# Altium PCB ART_CARD Rev 5.PcbDoc (part 3 of 13)
Units mil, origin at the board's own origin, x right, y up, seen from the top; angles counter-clockwise.
Board outline 6600.39 x 3903.54 mil, 8 copper layers (Top, Inner Layer 2, Inner Layer 3, Inner Layer 4, Inner Layer 5, Inner Layer 6, Inner Layer 7, Bottom), stack 63.111 mil thick; 542 components, 382 nets, 2410 pads, 1433 vias.
Unrouted connection lines stored in the file: 1247.
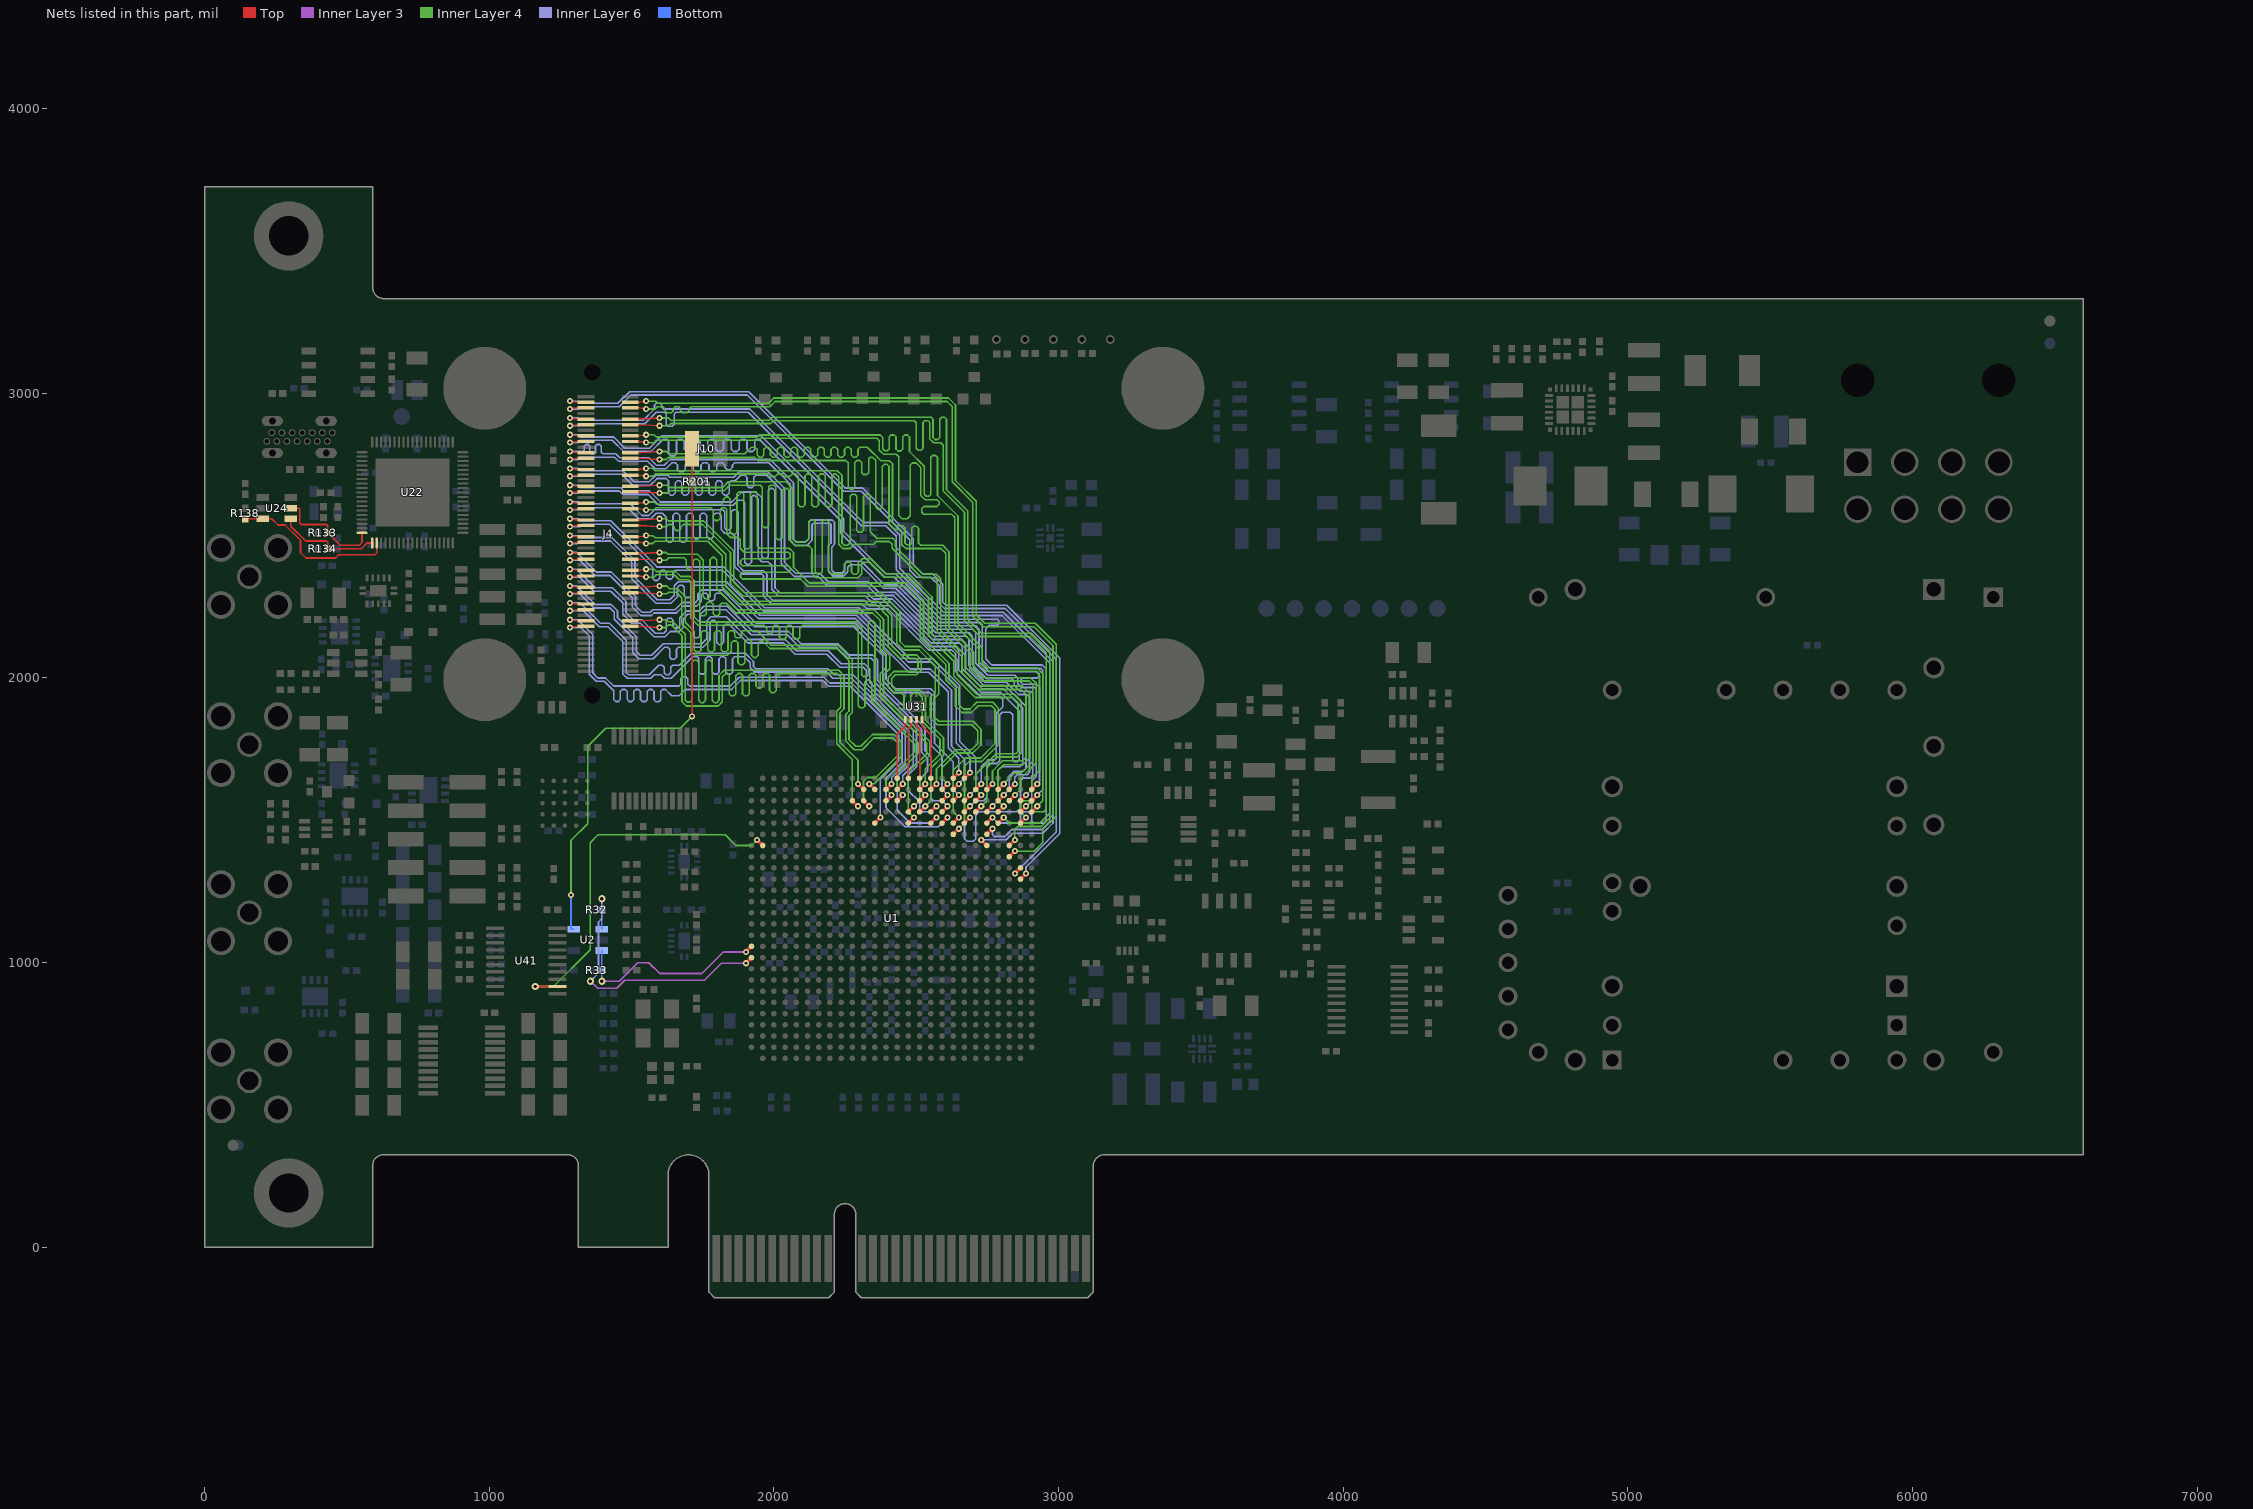
[diagram p9: the nets of this part, all layers, seen from the top]

## Via types
v1: diameter 25.59, hole 11.81, Top to Bottom, 915 vias
v2: diameter 21.65, hole 9.84, Top to Bottom, 518 vias

## Nets (pads, with @x,y where several pads share a name; then routed paths per layer and width w, separated by ;. In a path a pad name is that pad's centre, name@x,y a point inside that pad or via, vN(x,y) a via of type N, cw(c..) or ccw(c..) an arc to the next point about the centre after c; other vN are vias at no path point) (continued)
DCLS_IN3: U1.AE7 U41.12 | length 1350.6
  Top w5.91: v1(1161.42,916.34) U41.12@1240.16,916.34
  Top w11.81: v2(1940.94,1431.1) U1.AE7@1960.63,1411.42
  Inner Layer 4 w5.91: v1(1161.42,916.34) 1225.39,916.34 1354.33,1045.28 1354.33,1421.26 1381.89,1448.82 1828.74,1448.82 1866.14,1411.42 1921.26,1411.42 v2(1940.94,1431.1)
DCLS_OUT0: U1.N1 U31.2 | length 218.5
  Top w5.91: U1.N1@2433.07,1647.64 2433.07,1802.17 2461.61,1830.71 U31.2@2461.61,1854.33
DCLS_OUT1: U1.M1 U31.3 | length 210.4
  Top w5.91: U1.M1@2472.44,1647.64 2472.44,1821.85 2481.3,1830.71 U31.3@2481.3,1854.33
DCLS_OUT2: U1.L1 U31.4 | length 211.2
  Top w5.91: U31.4@2500.98,1854.33 2500.98,1830.71 2511.81,1819.88 U1.L1@2511.81,1647.64
DCLS_OUT3: U1.K1 U31.5 | length 219.3
  Top w5.91: U31.5@2520.67,1854.33 2520.67,1830.71 2551.18,1800.2 U1.K1@2551.18,1647.64
EECLK: R134.1 U22.1 U24.4 | length 365.9
  Top w5.91: U24.4@303.15,2559.06 303.15,2533.46 355.31,2481.3 428.15,2481.3 433.07,2476.38 R134.1@433.07,2453.74 551.18,2453.74 571.85,2474.41 U22.1@588.58,2474.41
EECS: R133.1 U22.76 U24.5 | length 384
  Top w5.91: U24.5@303.15,2596.46 330.71,2596.46 334.65,2592.52 334.65,2544.29 340.06,2538.88 428.64,2538.88 433.07,2534.45 R133.1@433.07,2509.84 476.38,2466.54 543.31,2466.54 553.15,2476.38 U22.76@553.15,2509.84
EEDATA: R138.2 U22.2 U24.3 | length 586.3
  Top w5.91: R138.2@142.72,2559.06 U24.3@204.72,2559.06 236.22,2559.06 257.87,2537.4 282.48,2537.4 336.61,2483.27 336.61,2440.94 356.3,2421.26 459.65,2421.26 471.46,2433.07 598.43,2433.07 604.33,2438.98 U22.2@604.33,2474.41
EEPROM_SCL: R32.2 U1.AF17 U2.1 | length 1034.9
  Top w11.81: v2(1901.57,998.03) U1.AF17@1921.26,1017.72
  Inner Layer 3 w5.91: v1(1355.32,935.04) 1380.59,909.77 1380.59,909.45 1447.83,909.45 1476.38,937.99 1755.91,937.99 1815.94,998.03 v2(1901.57,998.03)
  Inner Layer 6 w5.91: v1(1355.32,935.04) 1383.86,963.58 1383.86,1142.72 1395.67,1154.53 v1(1395.67,1224.41)
  Bottom w5.91: U2.1@1395.67,1117.13 R32.2@1395.67,1186.02 v1(1395.67,1224.41)
EEPROM_SDA: R33.2 U1.AF16 U2.3 | length 715.2
  Top w11.81: v2(1901.57,1037.4) U1.AF16@1921.26,1057.09
  Inner Layer 3 w5.91: v1(1395.67,935.04) 1456.69,935.04 1521.65,1000 1560.04,1000 1598.43,961.61 1746.06,961.61 1821.85,1037.4 v2(1901.57,1037.4)
  Bottom w5.91: v1(1395.67,935.04) R33.2@1395.67,973.43 U2.3@1395.67,1042.32
EEPROM_WP: J10.1 R201.2 U2.5 | length 2027.6
  Top w5.91: J10.1@1711.81,2805.12 1711.81,2724.21 1712.6,2723.43 R201.2@1712.6,2688.98 v2(1712.6,1865.16)
  Inner Layer 4 w5.91: v2(1287.4,1237.2) 1287.4,1430.12 1345.47,1488.19 1345.47,1759.84 1409.45,1823.82 1671.26,1823.82 v2(1712.6,1865.16)
  Bottom w5.91: v2(1287.4,1237.2) 1287.4,1117.13 U2.5@1297.24,1117.13
EXT_CI0: J4.65 U1.L3 | length 2112
  Top w5.91: v2(1283.46,2354.33) 1307.09,2358.27 J4.65@1339.57,2358.27
  Top w11.81: U1.L3@2511.81,1568.9 v2(2531.5,1588.58)
  Inner Layer 6 w5.91: v2(1283.46,2354.33) 1317.91,2354.33 1367.13,2305.12 1427.17,2305.12 1468.5,2263.78 1468.5,2224.41 1500.98,2191.93 1531.5,2191.93 1578.74,2144.69 1617.1,2144.69 1635.8,2163.39 1667.29,2163.39 1681.1,2177.19 1681.1,2206.72 1697.81,2223.43 1709.65,2223.43 1716.54,2216.54 1716.54,2148.62 1723.43,2141.73 1733.27,2141.73 1740.16,2148.62 1740.16,2221.49 1758.83,2240.16 1831.72,2240.16 1920.3,2151.57 2046.29,2151.57 2090.58,2107.28 2221.49,2107.28 2259.87,2068.9 2341.56,2068.9 2352.36,2058.1 2352.36,1986.22 2518.7,1819.88 2518.7,1739.17 2539.37,1718.5 2539.37,1672.24 2511.81,1644.69 2511.81,1608.27 v2(2531.5,1588.58)
EXT_CI1: J4.83 U1.R5 | length 2112
  Top w5.91: v2(1283.46,2177.17) 1307.09,2181.1 J4.83@1339.57,2181.1
  Top w11.81: U1.R5@2354.33,1490.16 v2(2374.02,1509.84)
  Inner Layer 6 w5.91: v2(1283.46,2177.17) 1321.85,2177.17 1351.38,2147.64 1351.38,2012.82 1376.01,1988.19 1403.54,1988.19 1437.01,1954.72 1437.01,1924.21 1443.9,1917.32 1453.74,1917.32 1460.63,1924.21 1460.63,1952.76 1467.15,1959.28 1477.36,1959.28 1484.25,1952.39 1484.25,1924.21 1491.14,1917.32 1500.98,1917.32 1507.87,1924.21 1507.87,1952.76 1514.4,1959.28 1524.61,1959.28 1531.5,1952.39 1531.5,1923.23 1537.4,1917.32 1549.21,1917.32 1555.12,1923.23 1555.12,1952.76 1561.64,1959.28 1571.85,1959.28 1578.74,1952.39 1578.74,1923.23 1585.63,1916.34 1595.47,1916.34 1602.36,1923.23 1602.36,1952.76 1608.88,1959.28 1619.09,1959.28 1641.36,1937.01 1666.34,1937.01 1688.61,1959.28 1850.98,1959.28 1882.85,1991.14 2171.29,1991.14 2191.96,1970.47 2267.72,1970.47 2437.99,1800.2 2437.99,1708.66 2374.02,1644.69 v2(2374.02,1509.84)
EXT_CO0: J4.54 U1.L2 | length 2111.7
  Top w5.91: J4.54@1495.08,2476.38 1527.56,2476.38 v2(1551.18,2472.44)
  Top w11.81: U1.L2@2511.81,1608.27 v2(2531.5,1627.95)
  Inner Layer 4 w5.91: v2(1551.18,2472.44) 1574.8,2472.44 1582.68,2480.31 1767.75,2480.31 1818.9,2429.16 1818.9,2318.93 1879.95,2257.87 2359.25,2257.87 2401.57,2215.55 2401.57,2109.28 2441.96,2068.9 2497.08,2068.9 2505.91,2060.07 2505.91,2032.45 2496.17,2022.72 2421.37,2022.72 2401.57,2002.92 2401.57,1966.56 2422.27,1945.87 2448.82,1945.87 2456.69,1937.99 2456.69,1892.72 2463.58,1885.83 2473.43,1885.83 2480.32,1892.72 2480.32,1937.99 2488.19,1945.87 2506.92,1945.87 2520.67,1932.12 2520.67,1847.47 2583.66,1784.48 2583.66,1732.25 2531.5,1680.09 v2(2531.5,1627.95)
EXT_CO1: J4.66 U1.P3 | length 2112
  Top w5.91: J4.66@1495.08,2358.27 1527.56,2358.27 v2(1551.18,2354.33)
  Top w11.81: U1.P3@2393.7,1568.9 v2(2413.39,1588.58)
  Inner Layer 4 w5.91: v2(1551.18,2354.33) 1578.74,2354.33 1586.61,2362.2 1649.61,2362.2 1667.36,2344.45 1700.86,2344.45 1707.68,2337.63 1707.68,2210.66 1733.3,2185.04 1964.57,2185.04 1974.41,2175.2 1974.41,2161.42 1980.32,2155.51 1990.16,2155.51 1996.06,2161.42 1996.06,2178.15 2002.95,2185.04 2012.8,2185.04 2019.69,2178.15 2019.69,2142.72 2026.57,2135.83 2036.42,2135.83 2043.31,2142.72 2043.31,2178.15 2050.2,2185.04 2060.04,2185.04 2066.93,2178.15 2066.93,2142.72 2073.82,2135.83 2083.66,2135.83 2090.55,2142.72 2090.55,2175.2 2100.39,2185.04 2282.48,2185.04 2296.26,2171.26 2296.26,1902.56 2303.15,1895.67 2313.98,1895.67 2319.88,1901.57 2319.88,1986.22 2326.73,1993.07 2335.63,1993.07 2343.5,1985.2 2343.5,1917.35 2494.09,1766.76 2494.09,1740.13 2393.7,1639.73 2393.7,1608.27 v2(2413.39,1588.58)
EXT_IO0: J4.69 U1.K4 | length 2112.1
  Top w5.91: v2(1283.46,2322.83) 1307.09,2318.9 J4.69@1339.57,2318.9
  Top w11.81: U1.K4@2551.18,1529.53 v2(2570.87,1549.21)
  Inner Layer 6 w5.91: v2(1283.46,2322.83) 1307.09,2322.83 1312.99,2316.93 1372.05,2257.87 1428.12,2257.87 1450.79,2235.21 1450.79,2211.61 1516.73,2145.67 1516.73,2093.5 1530.51,2079.72 1570.87,2079.72 1610.87,2119.73 1746.06,2119.73 1763.78,2137.45 1763.78,2199.8 1778.54,2214.57 1832.68,2214.57 1912.4,2134.84 2039.37,2134.84 2078.74,2095.47 2190.94,2095.47 2226.38,2060.04 2236.22,2050.2 2317.91,2050.2 2336.61,2031.5 2336.61,1985.24 2500.98,1820.87 2500.98,1687.99 2472.44,1659.45 2472.44,1604.33 2511.81,1564.96 2511.81,1536.42 2518.7,1529.53 2551.18,1529.53 v2(2570.87,1549.21)
EXT_IO1: J4.63 U1.J4 | length 2111.8
  Top w5.91: v2(1283.46,2381.89) 1307.09,2377.95 J4.63@1339.57,2377.95
  Top w11.81: U1.J4@2590.55,1529.53 v2(2610.24,1549.21)
  Inner Layer 6 w5.91: v2(1283.46,2381.89) 1307.09,2381.89 1372.05,2316.93 1433.07,2316.93 1480.32,2269.69 1480.32,2229.33 1505.91,2203.74 1536.42,2203.74 1582.68,2157.48 1613.19,2157.48 1622.05,2166.34 1622.05,2202.76 1628.94,2209.65 1638.78,2209.65 1645.67,2202.76 1645.67,2182.09 1652.56,2175.2 1662.4,2175.2 1669.29,2182.09 1669.29,2211.61 1692.91,2235.24 1737.2,2235.24 1753.94,2251.97 1836.61,2251.97 1925.2,2163.39 2051.18,2163.39 2095.47,2119.09 2226.38,2119.09 2264.76,2080.71 2346.46,2080.71 2364.17,2062.99 2364.17,1991.14 2530.51,1824.8 2530.51,1744.09 2551.18,1723.43 2551.18,1577.76 2560.04,1568.9 2590.55,1568.9 v2(2610.24,1549.21)
EXT_IO2: J4.40 U1.H6 | length 3109.2
  Top w5.91: J4.40@1495.08,2614.17 1527.56,2614.17 v2(1551.18,2618.11)
  Top w11.81: U1.H6@2629.92,1450.79 v2(2649.61,1470.47)
  Inner Layer 4 w5.91: v2(1551.18,2618.11) 1579.72,2618.11 1587.6,2610.24 1815.94,2610.24 1822.83,2617.13 1822.83,2627.95 1830.71,2635.83 1838.58,2635.83 1846.46,2627.95 1846.46,2511.81 1853.35,2504.92 1863.19,2504.92 1870.08,2511.81 1870.08,2646.65 1876.97,2653.54 1886.81,2653.54 1893.7,2646.65 1893.7,2460.63 1900.59,2453.74 1910.43,2453.74 1917.32,2460.63 1917.32,2646.65 1924.21,2653.54 1934.06,2653.54 1940.94,2646.65 1940.94,2464.57 1949.8,2455.71 2054.13,2455.71 2068.9,2440.94 2068.9,2388.67 2123.9,2333.66 2465.55,2333.66 2525.59,2273.62 2525.59,2141.73 2615.16,2052.17 2615.16,1999.02 2649.61,1964.57 2649.61,1906.5 2665.35,1890.75 2688.98,1890.75 2712.6,1914.37 2768.7,1914.37 2788.39,1894.69 2788.39,1764.76 2730.32,1706.69 2686.02,1706.69 2669.29,1689.96 2669.29,1490.16 v2(2649.61,1470.47)
EXT_IO3: J4.42 U1.H5 | length 3109.2
  Top w5.91: J4.42@1495.08,2594.49 1527.56,2594.49 v2(1551.18,2590.55)
  Top w11.81: U1.H5@2629.92,1490.16 v2(2649.61,1509.84)
  Inner Layer 4 w5.91: v2(1551.18,2590.55) 1578.74,2590.55 1586.61,2598.43 1777.56,2598.43 1787.4,2588.58 1787.4,2560.04 1794.29,2553.15 1804.13,2553.15 1811.02,2560.04 1811.02,2591.54 1817.91,2598.43 1827.76,2598.43 1834.65,2591.54 1834.65,2506.92 1848.45,2493.11 1875,2493.11 1881.89,2486.22 1881.89,2455.74 1895.74,2441.89 2051.25,2441.89 2057.09,2436.05 2057.09,2424.21 2051.18,2418.31 1889.76,2418.31 1882.87,2411.42 1882.87,2401.57 1889.76,2394.69 2050.2,2394.69 2057.09,2387.8 2057.09,2377.95 2050.2,2371.06 1889.76,2371.06 1882.87,2364.17 1882.87,2354.33 1889.76,2347.44 2093.42,2347.44 2119.01,2321.85 2460.66,2321.85 2513.78,2268.73 2513.78,2136.84 2603.35,2047.27 2603.35,1994.12 2637.8,1959.67 2637.8,1901.6 2660.46,1878.94 2693.87,1878.94 2717.49,1902.56 2763.81,1902.56 2776.57,1889.79 2776.57,1769.66 2725.42,1718.5 2672.95,1718.5 2629.92,1675.48 2629.92,1529.53 v2(2649.61,1509.84)
EXT_IO4: J4.75 U1.K5 | length 2111.9
  Top w5.91: v2(1283.46,2263.78) 1307.09,2259.84 J4.75@1339.57,2259.84
  Top w11.81: U1.K5@2551.18,1490.16 v2(2570.87,1509.84)
  Inner Layer 6 w5.91: v2(1283.46,2263.78) 1298.23,2263.78 1318.9,2263.78 1390.75,2191.93 1422.24,2191.93 1481.3,2132.87 1481.3,2018.7 1489.17,2010.83 1562.01,2010.83 1595.47,2044.29 1607.28,2044.29 1614.17,2037.4 1614.17,2017.72 1621.06,2010.83 1630.91,2010.83 1637.8,2017.72 1637.8,2037.4 1644.69,2044.29 1667.32,2044.29 1709.65,2086.61 1899.61,2086.61 1928.15,2058.07 1928.15,2040.35 1936.02,2032.48 2189.96,2032.48 2211.61,2010.83 2277.56,2010.83 2473.43,1814.96 2473.43,1693.9 2433.07,1653.54 2433.07,1535.43 2478.35,1490.16 2551.18,1490.16 v2(2570.87,1509.84)
EXT_IO5: J4.81 U1.J5 | length 2111.8
  Top w5.91: v2(1283.46,2204.72) 1307.09,2200.79 J4.81@1339.57,2200.79
  Top w11.81: U1.J5@2590.55,1490.16 v2(2610.24,1509.84)
  Inner Layer 6 w5.91: v2(1283.46,2204.72) 1311.02,2204.72 1363.19,2152.56 1363.19,2017.72 1380.91,2000 1408.46,2000 1437.01,1971.46 1666.34,1971.46 1673.23,1978.35 1673.23,1997.05 1680.12,2003.94 1689.96,2003.94 1696.85,1997.05 1696.85,1978.35 1703.74,1971.46 1846.46,1971.46 1877.95,2002.95 2176.18,2002.95 2196.85,1982.28 2272.64,1982.28 2359.25,1895.67 2359.31,1895.67 2449.8,1805.18 2449.8,1703.74 2393.7,1647.64 2393.7,1544.29 2460.63,1477.36 2577.76,1477.36 v2(2610.24,1509.84)
EXT_IO6: J4.58 U1.M4 | length 2112
  Top w5.91: J4.58@1495.08,2437.01 1532.48,2437.01 v2(1598.43,2440.94)
  Top w11.81: U1.M4@2472.44,1529.53 v2(2492.13,1549.21)
  Inner Layer 4 w5.91: v2(1598.43,2440.94) 1622.05,2440.94 1628.94,2434.06 1731.3,2434.06 1751.97,2413.39 1751.97,2285.43 1758.86,2278.54 1768.7,2278.54 1775.59,2285.43 1775.59,2415.35 1783.46,2423.23 1791.34,2423.23 1799.21,2415.35 1799.21,2312.99 1872.05,2240.16 2351.38,2240.16 2384.84,2206.69 2384.84,2100.39 2406.5,2078.74 2406.5,2032.48 2384.84,2010.83 2384.84,1938.98 2548.23,1775.59 2548.23,1729.33 2511.81,1692.91 2511.81,1568.9 v2(2492.13,1549.21)
EXT_IO7: J4.52 U1.L4 | length 2112.1
  Top w5.91: J4.52@1495.08,2496.06 1527.56,2496.06 v2(1551.18,2500)
  Top w11.81: U1.L4@2511.81,1529.53 v2(2531.5,1549.21)
  Inner Layer 4 w5.91: v2(1551.18,2500) 1574.8,2500 1582.68,2492.13 1772.64,2492.13 1830.71,2434.06 1830.71,2323.82 1884.84,2269.69 2364.17,2269.69 2413.39,2220.47 2413.39,2114.17 2446.85,2080.71 2501.97,2080.71 2517.72,2064.96 2517.72,2027.56 2500.98,2010.83 2426.18,2010.83 2413.39,1998.03 2413.39,1971.46 2427.17,1957.68 2511.81,1957.68 2532.48,1937.01 2532.48,1852.36 2595.47,1789.37 2595.47,1727.36 2551.18,1683.07 2551.18,1568.9 v2(2531.5,1549.21)
EXT_IO8: J4.57 U1.H3 | length 2112.2
  Top w5.91: v2(1283.46,2440.94) 1307.09,2437.01 J4.57@1339.57,2437.01
  Top w11.81: U1.H3@2629.92,1568.9 v2(2649.61,1588.58)
  Inner Layer 6 w5.91: v2(1283.46,2440.94) 1307.09,2440.94 1375.98,2372.05 1428.15,2372.05 1513.78,2286.42 1513.78,2254.13 1536.61,2231.3 1564.96,2231.3 1573.82,2240.16 1652.56,2240.16 1677.17,2264.76 1723.43,2264.76 1733.27,2274.61 1733.27,2296.26 1746.06,2309.06 1819.88,2309.06 1937.01,2191.93 2285.43,2191.93 2393.7,2083.66 2393.7,1995.05 2427.17,1961.59 2551.21,1961.59 2563.98,1948.82 2563.98,1770.67 2629.92,1704.72 2629.92,1608.27 v2(2649.61,1588.58)
EXT_IO9: J4.45 U1.G3 | length 2112.2
  Top w5.91: v2(1283.46,2559.06) 1307.09,2555.12 J4.45@1339.57,2555.12
  Top w11.81: U1.G3@2669.29,1568.9 v2(2688.98,1588.58)
  Inner Layer 6 w5.91: v2(1283.46,2559.06) 1311.02,2559.06 1317.91,2552.17 1427.17,2552.17 1589.57,2389.76 1824.3,2389.76 1967.01,2247.05 2298.23,2247.05 2477.36,2067.91 2558.07,2067.91 2652.56,1973.43 2652.56,1776.55 2708.66,1720.44 2708.66,1608.27 v2(2688.98,1588.58)
EXT_IO10: J4.64 U1.N3 | length 2112.2
  Top w5.91: J4.64@1495.08,2377.95 1527.56,2377.95 v2(1551.18,2381.89)
  Top w11.81: U1.N3@2433.07,1568.9 v2(2452.76,1588.58)
  Inner Layer 4 w5.91: v2(1551.18,2381.89) 1578.74,2381.89 1586.61,2374.02 1654.53,2374.02 1672.24,2356.3 1705.71,2356.3 1719.49,2342.52 1719.49,2215.55 1738.19,2196.85 2290.35,2196.85 2308.07,2179.13 2308.07,2011.81 2314.96,2004.92 2325.79,2004.92 2331.69,2010.83 2331.69,2192.91 2338.58,2199.8 2348.43,2199.8 2355.32,2192.91 2355.32,1922.24 2505.91,1771.65 2505.91,1735.24 2433.07,1662.4 2433.07,1608.27 v2(2452.76,1588.58)
EXT_IO11: J4.60 U1.M5 | length 2112.3
  Top w5.91: J4.60@1495.08,2417.32 1532.48,2417.32 v2(1598.43,2413.39)
  Top w11.81: U1.M5@2472.44,1490.16 v2(2492.13,1509.84)
  Inner Layer 4 w5.91: v2(1598.43,2413.39) 1622.05,2413.39 1630.91,2422.24 1684.06,2422.24 1691.93,2414.37 1691.93,2388.78 1698.82,2381.89 1708.66,2381.89 1715.55,2388.78 1715.55,2410.43 1722.44,2417.32 1731.3,2417.32 1739.17,2409.45 1739.17,2225.39 1746.06,2218.5 1755.91,2218.5 1762.8,2225.39 1762.8,2259.84 1769.69,2266.73 1778.54,2266.73 1786.42,2258.86 1786.42,2225.39 1793.31,2218.5 1803.15,2218.5 1810.04,2225.39 1810.04,2255.91 1816.93,2262.8 1832.68,2262.8 1867.13,2228.35 2346.49,2228.35 2373.03,2201.8 2373.03,2095.5 2394.69,2073.85 2394.69,2037.37 2373.03,2015.72 2373.03,1934.06 2536.42,1770.67 2536.42,1734.22 2472.44,1670.25 2472.44,1529.53 v2(2492.13,1509.84)
EXT_IO12: J4.59 U1.J3 | length 2112.3
  Top w5.91: v2(1283.46,2413.39) 1307.09,2417.32 J4.59@1339.57,2417.32
  Top w11.81: U1.J3@2590.55,1568.9 v2(2610.24,1588.58)
  Inner Layer 6 w5.91: v2(1283.46,2413.39) 1317.91,2413.39 1371.06,2360.24 1423.26,2360.24 1501.97,2281.53 1501.97,2249.24 1531.72,2219.49 1569.88,2219.49 1578.74,2228.35 1657.45,2228.35 1682.06,2252.95 1728.32,2252.95 1745.08,2269.71 1745.08,2291.34 1750.98,2297.24 1762.8,2297.24 1768.7,2291.34 1768.7,2277.56 1775.59,2270.67 1785.43,2270.67 1792.32,2277.56 1792.32,2291.34 1798.23,2297.24 1814.99,2297.24 1932.2,2180.04 2280.59,2180.04 2381.89,2078.74 2381.89,1990.16 2423.23,1948.82 2546.26,1948.82 2552.17,1942.91 2552.17,1762.8 2590.55,1724.41 2590.55,1608.27 v2(2610.24,1588.58)
EXT_IO13: J4.51 U1.H2 | length 2111.9
  Top w5.91: v2(1283.46,2500) 1307.09,2496.06 J4.51@1339.57,2496.06
  Top w11.81: U1.H2@2629.92,1608.27 v2(2649.61,1627.95)
  Inner Layer 6 w5.91: v2(1283.46,2500) 1309.06,2500 1315.94,2493.11 1431.1,2493.11 1511.81,2412.4 1511.81,2353.35 1590.55,2274.61 1633.86,2274.61 1649.61,2290.35 1649.61,2323.82 1663.39,2337.6 1832.68,2337.6 1949.8,2220.47 2290.35,2220.47 2479.33,2031.5 2549.21,2031.5 2624.02,1956.69 2624.02,1759.84 2669.29,1714.57 2669.29,1647.64 v2(2649.61,1627.95)
EXT_IO14: J4.48 U1.K2 | length 2112.4
  Top w5.91: J4.48@1495.08,2535.43 1532.48,2535.43 v2(1598.43,2531.5)
  Top w11.81: U1.K2@2551.18,1608.27 v2(2570.87,1627.95)
  Inner Layer 4 w5.91: v2(1598.43,2531.5) 1622.05,2531.5 1629.92,2539.37 1640.75,2539.37 1649.61,2530.51 1649.61,2524.61 1656.5,2517.72 1666.34,2517.72 1673.23,2524.61 1673.23,2530.51 1682.09,2539.37 1749.04,2539.37 1847.44,2440.97 1847.44,2331.72 1891.8,2287.36 2372.12,2287.36 2431.1,2228.38 2431.1,2123.06 2455.78,2098.39 2509.91,2098.39 2566.93,2041.37 2566.93,1948.79 2550.2,1932.06 2550.2,1859.28 2573.89,1835.59 2694.95,1835.59 2715.55,1814.99 2715.55,1769.66 2693.93,1748.03 2637.82,1748.03 2570.87,1681.07 v2(2570.87,1627.95)
EXT_IO15: J4.46 U1.J2 | length 2112
  Top w5.91: J4.46@1495.08,2555.12 1532.48,2555.12 v2(1598.43,2559.06)
  Top w11.81: U1.J2@2590.55,1608.27 v2(2610.24,1627.95)
  Inner Layer 4 w5.91: v2(1598.43,2559.06) 1622.05,2559.06 1629.92,2551.18 1753.94,2551.18 1859.25,2445.87 1859.25,2336.61 1896.65,2299.21 2376.97,2299.21 2442.91,2233.27 2442.91,2127.95 2460.63,2110.24 2514.76,2110.24 2578.74,2046.26 2578.74,1943.9 2562.01,1927.17 2562.01,1864.17 2578.74,1847.44 2699.8,1847.44 2727.36,1819.88 2727.36,1764.76 2698.82,1736.22 2642.72,1736.22 2590.55,1684.06 2590.55,1647.64 v2(2610.24,1627.95)
EXT_IO16: J4.53 U1.H1 | length 2112.3
  Top w5.91: v2(1283.46,2472.44) 1307.09,2476.38 J4.53@1339.57,2476.38
  Top w11.81: U1.H1@2629.92,1647.64 v2(2649.61,1667.32)
  Inner Layer 6 w5.91: v2(1283.46,2472.44) 1311.02,2472.44 1319.88,2481.3 1426.18,2481.3 1500,2407.48 1500,2348.43 1585.66,2262.77 1638.72,2262.77 1661.42,2285.46 1661.42,2318.93 1668.28,2325.79 1678.15,2325.79 1685.04,2318.9 1685.04,2289.37 1691.93,2282.48 1701.77,2282.48 1708.66,2289.37 1708.66,2317.91 1716.54,2325.79 1827.78,2325.79 1944.91,2208.66 2285.43,2208.66 2474.41,2019.69 2544.29,2019.69 2612.2,1951.77 2612.2,1754.89 2649.61,1717.49 v2(2649.61,1667.32)
EXT_IO17: J4.47 U1.G1 | length 2112.1
  Top w5.91: v2(1283.46,2531.5) 1307.09,2535.43 J4.47@1339.57,2535.43
  Top w11.81: U1.G1@2669.29,1647.64 v2(2688.98,1667.32)
  Inner Layer 6 w5.91: v2(1283.46,2531.5) 1317.91,2531.5 1326.77,2540.35 1422.24,2540.35 1574.8,2387.8 1574.8,2349.41 1581.69,2342.52 1590.55,2342.52 1598.43,2350.39 1598.43,2371.06 1605.32,2377.95 1615.16,2377.95 1622.05,2371.06 1622.05,2354.33 1628.94,2347.44 1638.78,2347.44 1645.67,2354.33 1645.67,2371.06 1652.56,2377.95 1819.4,2377.95 1962.12,2235.24 2292.32,2235.24 2471.46,2056.1 2553.15,2056.1 2640.75,1968.5 2640.75,1771.65 2688.98,1723.43 v2(2688.98,1667.32)
EXT_IO18: J4.72 U1.T3 | length 2112
  Top w5.91: J4.72@1495.08,2299.21 1532.48,2299.21 v2(1598.43,2295.28)
  Top w11.81: U1.T3@2314.96,1568.9 v2(2334.65,1549.21)
  Inner Layer 4 w5.91: v2(1598.43,2295.28) 1624.42,2295.28 1630.56,2301.41 1630.79,2301.18 1656.52,2301.18 1676.18,2281.52 1676.18,2190.97 1708.66,2158.49 1708.66,2093.53 1722.47,2079.72 1836.59,2079.72 1850.39,2093.53 1850.39,2123.03 1857.26,2129.89 1867.13,2129.89 1874.02,2123 1874.02,2053.15 1880.91,2046.26 1890.75,2046.26 1897.64,2053.15 1897.64,2126.97 1904.53,2133.86 1914.37,2133.86 1921.26,2126.97 1921.26,2079.72 1929.13,2071.85 1937.01,2071.85 1944.88,2079.72 1944.88,2123.03 1951.75,2129.89 1959.63,2129.89 1986.22,2103.31 2220.54,2103.31 2263.78,2060.07 2263.78,1883.83 2251.97,1872.02 2251.97,1778.57 2282.51,1748.03 2310.01,1748.03 2351.35,1789.37 2417.35,1789.37 2436.02,1770.7 2436.02,1728.32 2358.3,1650.59 2328.74,1650.59 2314.96,1636.81 2314.96,1568.9 v2(2334.65,1549.21)
EXT_IO19: J4.84 U1.U3 | length 2111.9
  Top w5.91: J4.84@1495.08,2181.1 1532.48,2181.1 v2(1598.43,2177.17)
  Top w11.81: U1.U3@2275.59,1568.9 v2(2295.28,1549.21)
  Inner Layer 4 w5.91: v2(1598.43,2177.17) 1620.08,2177.17 1628.94,2186.02 1639.79,2186.02 1677.17,2148.65 1677.17,1916.34 1691.93,1901.57 1804.1,1901.57 1818.9,1916.37 1818.9,2003.94 1830.67,2015.71 1837.6,2015.71 1842.52,2010.79 1842.52,1943.9 1849.41,1937.01 1859.25,1937.01 1866.14,1943.9 1866.14,2007.87 1873.98,2015.71 1883.86,2015.71 1889.76,2009.8 1889.76,1943.9 1896.65,1937.01 1906.5,1937.01 1913.39,1943.9 1913.39,2009.84 1919.25,2015.71 1931.1,2015.71 1937.01,2009.8 1937.01,1971.46 1943.9,1964.57 1953.74,1964.57 1960.63,1971.46 1960.63,2009.84 1966.5,2015.71 1979.33,2015.71 1984.25,2010.79 1984.25,1955.71 1992.13,1947.83 2000,1947.83 2007.87,1955.71 2007.87,2010.83 2012.75,2015.71 2222.44,2015.71 2234.25,2003.9 2234.25,1896.62 2220.47,1882.85 2220.47,1768.73 2275.59,1713.61 2275.59,1568.9 v2(2295.28,1549.21)
EXT_IO20: J4.71 U1.N2 | length 2112.1
  Top w5.91: v2(1283.46,2295.28) 1307.09,2299.21 J4.71@1339.57,2299.21
  Top w11.81: U1.N2@2433.07,1608.27 v2(2452.76,1627.95)
  Inner Layer 6 w5.91: v2(1283.46,2295.28) 1317.94,2295.28 1367.16,2246.06 1423.23,2246.06 1438.98,2230.31 1438.98,2206.2 1504.43,2140.75 1504.43,2088.58 1525.1,2067.91 1575.76,2067.91 1615.76,2107.92 1626.97,2107.92 1633.86,2101.03 1633.86,2072.83 1640.75,2065.94 1650.59,2065.94 1657.48,2072.83 1657.48,2100.39 1665,2107.92 1750.96,2107.92 1775.59,2132.55 1775.59,2194.91 1783.44,2202.76 1791.34,2202.76 1799.21,2194.88 1799.21,2125 1807.09,2117.13 1814.96,2117.13 1822.83,2125 1822.83,2182.09 1828.74,2187.99 1842.53,2187.99 1907.5,2123.03 2034.48,2123.03 2073.85,2083.66 2186.02,2083.66 2232.28,2037.4 2314.01,2037.4 2324.8,2026.6 2324.8,1980.31 2489.17,1815.94 2489.17,1692.91 2452.76,1656.5 v2(2452.76,1627.95)
EXT_IO21: J4.77 U1.P2 | length 2112.3
  Top w5.91: v2(1283.46,2236.22) 1307.09,2240.16 J4.77@1339.57,2240.16
  Top w11.81: U1.P2@2393.7,1608.27 v2(2413.39,1627.95)
  Inner Layer 6 w5.91: v2(1283.46,2236.22) 1329.75,2236.22 1385.89,2180.09 1417.38,2180.09 1469.49,2127.98 1469.49,2013.78 1484.25,1999.02 1566.9,1999.02 1579.7,2011.81 1603.38,2011.81 1616.17,1999.02 1638.75,1999.02 1714.54,2074.8 1730.32,2074.8 1736.22,2068.9 1736.22,2020.67 1743.11,2013.78 1752.95,2013.78 1759.84,2020.67 1759.84,2067.91 1766.73,2074.8 1776.57,2074.8 1783.46,2067.91 1783.46,2020.67 1790.35,2013.78 1801.18,2013.78 1807.09,2019.69 1807.09,2067.91 1813.98,2074.8 1824.8,2074.8 1830.71,2068.9 1830.71,2019.69 1836.61,2013.78 1848.43,2013.78 1854.33,2019.69 1854.33,2067.91 1861.22,2074.8 1894.71,2074.8 1916.34,2053.18 1916.34,2035.46 1931.16,2020.64 2185.07,2020.64 2206.69,1999.02 2272.64,1999.02 2364.17,1907.48 2461.61,1810.07 2461.61,1698.82 2413.39,1650.59 v2(2413.39,1627.95)
EXT_IO22: J4.82 U1.T2 | length 2111.9
  Top w5.91: J4.82@1495.08,2200.79 1532.48,2200.79 v2(1598.43,2204.72)
  Top w11.81: v2(2295.28,1627.95) U1.T2@2314.96,1608.27
  Inner Layer 4 w5.91: v2(1598.43,2204.72) 1623.03,2204.72 1629.92,2197.83 1644.69,2197.83 1688.98,2153.54 1688.98,1922.24 1695.87,1915.35 1705.71,1915.35 1712.6,1922.24 1712.6,2055.12 1719.49,2062.01 1729.33,2062.01 1736.22,2055.12 1736.22,1921.26 1744.09,1913.39 1751.97,1913.39 1759.84,1921.26 1759.84,2055.12 1766.73,2062.01 1776.57,2062.01 1783.46,2055.12 1783.46,1921.26 1791.34,1913.39 1799.21,1913.39 1807.09,1921.26 1807.09,2008.86 1825.79,2027.56 2227.36,2027.56 2246.06,2008.86 2246.06,1891.73 2232.28,1877.95 2232.28,1773.62 2295.28,1710.63 v2(2295.28,1627.95)
EXT_IO23: J4.70 U1.R2 | length 2111.9
  Top w5.91: J4.70@1495.08,2318.9 1532.48,2318.9 v2(1598.43,2322.83)
  Top w11.81: v2(2334.65,1627.95) U1.R2@2354.33,1608.27
  Inner Layer 4 w5.91: v2(1598.43,2322.83) 1623.03,2322.83 1632.87,2312.99 1661.42,2312.99 1687.99,2286.42 1687.99,2195.87 1720.47,2163.39 1720.47,2098.43 1727.36,2091.54 1737.2,2091.54 1744.09,2098.43 1744.09,2158.46 1750.98,2165.35 1760.83,2165.35 1767.72,2158.46 1767.72,2098.43 1774.61,2091.54 1784.45,2091.54 1791.34,2098.43 1791.34,2158.46 1798.23,2165.35 1808.07,2165.35 1814.96,2158.46 1814.96,2098.43 1821.85,2091.54 1831.69,2091.54 1838.58,2098.43 1838.58,2158.46 1845.47,2165.35 1855.32,2165.35 1862.2,2158.46 1862.2,2147.64 1868.11,2141.73 1879.92,2141.73 1885.83,2147.64 1885.83,2160.43 1890.75,2165.35 1940.94,2165.35 1991.14,2115.16 2225.39,2115.16 2275.59,2064.96 2275.59,1878.94 2263.78,1867.13 2263.78,1783.46 2287.4,1759.84 2305.12,1759.84 2346.46,1801.18 2422.24,1801.18 2447.83,1775.59 2447.83,1723.43 2352.36,1627.95 v2(2334.65,1627.95)
EXT_IO24: J4.15 U1.E5 | length 3109.2
  Top w5.91: v2(1283.46,2854.33) 1307.09,2850.39 J4.15@1339.57,2850.39
  Top w11.81: U1.E5@2748.03,1490.16 v2(2767.72,1509.84)
  Inner Layer 6 w5.91: v2(1283.46,2854.33) 1311.02,2854.33 1318.9,2846.46 1437.01,2846.46 1476.38,2807.09 1562.99,2807.09 1606.3,2850.39 1954.72,2850.39 2245.08,2560.04 2245.08,2514.76 2393.7,2366.14 2427.17,2366.14 2586.61,2206.69 2784.45,2206.69 2789.37,2201.77 2789.37,2189.96 2784.45,2185.04 2756.89,2185.04 2744.09,2172.24 2744.09,2066.93 2765.75,2045.28 2942.91,2045.28 2956.69,2031.5 2956.69,1500 2946.85,1490.16 2925.2,1490.16 2912.4,1490.16 2905.51,1497.05 2905.51,1518 2893.98,1529.53 2877.67,1529.53 2866.14,1518 2866.14,1498.03 2858.27,1490.16 2846.46,1490.16 2807.09,1490.16 2787.4,1490.16 v2(2767.72,1509.84)
EXT_IO25: J4.35 U1.E4 | length 3109.2
  Top w5.91: v2(1283.46,2649.61) 1307.09,2653.54 J4.35@1339.57,2653.54
  Top w11.81: U1.E4@2748.03,1529.53 v2(2767.72,1549.21)
  Inner Layer 6 w5.91: v2(1283.46,2649.61) 1311.02,2649.61 1317.91,2656.5 1456.69,2656.5 1468.5,2644.69 1558.07,2644.69 1596.46,2606.29 1857.25,2606.29 1875,2624.04 1889.76,2624.04 1897.64,2616.17 1897.64,2406.5 1904.53,2399.61 1914.37,2399.61 1921.26,2406.5 1921.26,2635.83 1926.18,2640.75 1933.07,2640.75 1944.88,2628.94 1944.88,2421.29 1957.71,2408.46 1979.33,2408.46 1992.13,2395.67 1992.13,2311.05 2015.8,2287.38 2321.87,2287.38 2343.5,2265.75 2410.43,2265.75 2553.19,2122.99 2651.57,2122.99 2661.42,2113.15 2661.42,2032.68 2732.9,1961.2 2806.6,1961.2 2874.02,1893.79 2874.02,1698.82 2863.19,1687.99 2799.92,1687.99 2787.4,1675.48 2787.4,1568.9 v2(2767.72,1549.21)
EXT_IO26: J4.10 U1.D5 | length 3109.1
  Top w5.91: J4.10@1495.08,2909.45 1532.48,2909.45 v2(1598.43,2913.39)
  Top w11.81: U1.D5@2787.4,1490.16 v2(2807.09,1509.84)
  Inner Layer 4 w5.91: v2(1598.43,2913.39) 1629.92,2913.39 1637.79,2905.51 1984.25,2905.51 1994.09,2915.35 2552.17,2915.35 2559.06,2908.46 2559.06,2844.49 2565.94,2837.6 2575.79,2837.6 2582.68,2844.49 2582.68,2908.46 2589.57,2915.35 2599.41,2915.35 2606.3,2908.46 2606.3,2661.42 2681.1,2586.61 2681.1,2205.71 2729.33,2157.48 2904.53,2157.48 2968.5,2093.5 2968.5,1524.61 2934.06,1490.16 2826.77,1490.16 v2(2807.09,1509.84)
EXT_IO27: J4.28 U1.D4 | length 3109.2
  Top w5.91: J4.28@1495.08,2732.28 1527.56,2732.28 v2(1551.18,2736.22)
  Top w11.81: U1.D4@2787.4,1529.53 v2(2807.09,1549.21)
  Inner Layer 4 w5.91: v2(1551.18,2736.22) 1574.8,2736.22 1582.68,2728.35 2222.44,2728.35 2239.17,2711.61 2239.17,2474.41 2247.05,2466.54 2259.84,2466.54 2267.72,2474.41 2267.72,2638.78 2274.61,2645.67 2284.45,2645.67 2291.34,2638.78 2291.34,2518.7 2298.23,2511.81 2308.07,2511.81 2314.96,2518.7 2314.96,2638.78 2321.85,2645.67 2331.69,2645.67 2338.58,2638.78 2338.58,2513.78 2361.22,2491.14 2417.32,2491.14 2427.17,2481.3 2427.17,2460.63 2523.62,2364.17 2569.88,2364.17 2585.63,2348.43 2585.63,2166.34 2672.24,2079.72 2672.24,2023.62 2724.41,1971.46 2873.03,1971.46 2897.64,1946.85 2897.64,1717.52 2875,1694.88 2806.81,1694.88 2787.4,1675.48 2787.4,1568.9 v2(2807.09,1549.21)
EXT_IO28: J4.9 U1.E7 | length 3109.5
  Top w5.91: v2(1283.46,2913.39) 1307.09,2909.45 J4.9@1339.57,2909.45
  Top w11.81: v2(2728.35,1431.1) U1.E7@2748.03,1411.42
  Inner Layer 6 w5.91: v2(1283.46,2913.39) 1311.02,2913.39 1318.9,2905.51 1541.24,2905.51 1580.61,2944.88 1580.61,2958.66 1586.52,2964.57 1600.39,2964.57 1606.3,2958.66 1606.3,2950.79 1612.2,2944.88 1915.14,2944.88 2313.77,2546.26 2397.89,2546.26 2441.93,2502.22 2441.93,2384.87 2595.5,2231.3 2806.18,2231.3 2980.32,2057.17 2980.32,1490.22 2944.82,1454.72 2840.07,1454.72 2816.45,1431.1 v2(2728.35,1431.1)
EXT_IO29: J4.11 U1.E6 | length 3109.5
  Top w5.91: v2(1283.46,2885.83) 1307.09,2889.76 J4.11@1339.57,2889.76
  Top w11.81: U1.E6@2748.03,1450.79 v2(2767.72,1470.47)
  Inner Layer 6 w5.91: v2(1283.46,2885.83) 1311.02,2885.83 1317.91,2892.72 1546.74,2892.72 1587.09,2933.07 1616.14,2933.07 1622.05,2927.17 1622.05,2890.75 1628.94,2883.86 1642.72,2883.86 1649.61,2890.75 1649.61,2927.17 1655.51,2933.07 1909.45,2933.07 2308.07,2534.45 2393,2534.45 2430.12,2497.33 2430.12,2379.98 2590.61,2219.49 2801.29,2219.49 2968.5,2052.28 2968.5,1495.11 2940.92,1467.52 2835.63,1467.52 2811.06,1442.95 2773.58,1442.95 2767.72,1448.82 v2(2767.72,1470.47)
EXT_IO30: J4.34 U1.F4 | length 3109.4
  Top w5.91: J4.34@1495.08,2673.23 1532.48,2673.23 v2(1598.43,2677.17)
  Top w11.81: U1.F4@2708.66,1529.53 v2(2728.35,1549.21)
  Inner Layer 4 w5.91: v2(1598.43,2677.17) 1625,2677.17 1632.87,2669.29 1819.88,2669.29 1839.57,2688.98 2042.32,2688.98 2064.96,2666.34 2064.96,2490.16 2078.74,2476.38 2109.25,2476.38 2122.05,2489.17 2122.05,2548.23 2128.94,2555.12 2138.78,2555.12 2145.67,2548.23 2145.67,2372.05 2152.56,2365.16 2162.4,2365.16 2169.29,2372.05 2169.29,2548.23 2176.18,2555.12 2186.02,2555.12 2192.91,2548.23 2192.91,2375.98 2203.74,2365.16 2242.13,2365.16 2249.02,2372.05 2249.02,2400.59 2255.91,2407.48 2265.75,2407.48 2272.64,2400.59 2272.64,2371.06 2279.53,2364.17 2290.35,2364.17 2297.24,2371.06 2297.24,2405.51 2310.04,2418.31 2339.57,2418.31 2391.73,2366.14 2473.43,2366.14 2555.12,2284.45 2555.12,2152.56 2643.7,2063.98 2643.7,2011.81 2712.6,1942.91 2844.49,1942.91 2869.09,1918.31 2869.09,1737.2 2854.33,1722.44 2786.42,1722.44 2748.03,1684.06 2748.03,1568.9 v2(2728.35,1549.21)
EXT_IO31: J4.36 U1.F3 | length 3109.1
  Top w5.91: J4.36@1495.08,2653.54 1532.48,2653.54 v2(1598.43,2649.61)
  Top w11.81: U1.F3@2708.66,1568.9 v2(2728.35,1588.58)
  Inner Layer 4 w5.91: v2(1598.43,2649.61) 1625.98,2649.61 1633.86,2657.48 1824.77,2657.48 1844.45,2677.15 1951.77,2677.15 1958.66,2670.26 1958.66,2535.43 1965.55,2528.54 1975.39,2528.54 1982.28,2535.43 1982.28,2671.26 1988.18,2677.15 2000,2677.15 2005.91,2671.25 2005.91,2493.11 2012.8,2486.22 2022.64,2486.22 2029.53,2493.11 2029.53,2659.45 2035.43,2665.35 2047.24,2665.35 2053.15,2659.45 2053.15,2485.27 2073.85,2464.57 2122.05,2464.57 2133.86,2452.76 2133.86,2367.16 2148.65,2352.36 2295.25,2352.36 2309.06,2366.17 2309.06,2400.62 2314.93,2406.5 2334.66,2406.5 2386.84,2354.32 2468.55,2354.32 2543.31,2279.56 2543.31,2147.67 2631.89,2059.08 2631.89,2006.92 2707.71,1931.1 2839.53,1931.1 2857.28,1913.35 2857.28,1742.1 2849.44,1734.25 2781.53,1734.25 2708.66,1661.39 2708.66,1608.27 v2(2728.35,1588.58)
EXT_IO32: J4.27 U1.G5 | length 3109.2
  Top w5.91: v2(1283.46,2736.22) 1307.09,2732.28 J4.27@1339.57,2732.28
  Top w11.81: U1.G5@2669.29,1490.16 v2(2688.98,1509.84)
  Inner Layer 6 w5.91: v2(1283.46,2736.22) 1311.02,2736.22 1318.9,2728.35 1469.49,2728.35 1508.86,2688.98 1561.02,2688.98 1584.65,2712.6 1626.48,2712.6 1634.35,2704.72 1858.76,2704.72 1878.44,2724.41 1979.33,2724.41 2037.4,2666.34 2037.4,2406.5 2075.79,2368.11 2160.43,2368.11 2190.94,2337.6 2331.69,2337.6 2368.11,2301.18 2425.2,2301.18 2567.91,2158.46 2686.02,2158.46 2696.85,2147.64 2696.85,2047.36 2747.16,1997.05 2836.61,1997.05 2844.49,1989.17 2844.49,1973.43 2864.17,1953.74 2901.57,1953.74 2909.45,1945.87 2909.45,1682.09 2909.45,1658.44 2899.64,1648.62 2875.98,1648.62 2866.14,1638.78 2866.14,1543.31 2852.36,1529.53 2720.19,1529.53 2708.66,1518 2708.66,1434.06 2700.79,1426.18 2678.15,1426.18 2669.29,1435.04 2669.29,1490.16 v2(2688.98,1509.84)
EXT_IO33: J4.39 U1.G4 | length 3109.5
  Top w5.91: v2(1283.46,2618.11) 1307.09,2614.17 J4.39@1339.57,2614.17
  Top w11.81: U1.G4@2669.29,1529.53 v2(2688.98,1549.21)
  Inner Layer 6 w5.91: v2(1283.46,2618.11) 1312.99,2618.11 1318.9,2612.2 1495.42,2612.2 1536.76,2570.87 1560.75,2570.87 1580.43,2590.55 1819.88,2590.55 1826.77,2583.66 1826.77,2526.57 1832.68,2520.67 1844.49,2520.67 1850.39,2526.57 1850.39,2583.66 1857.28,2590.55 1867.13,2590.55 1874.02,2583.66 1874.02,2395.67 1892.72,2376.97 1962.6,2376.97 1975.39,2364.17 1975.39,2292.32 1995.08,2272.64 2316.93,2272.64 2335.63,2253.94 2405.48,2253.94 2549.18,2110.24 2635.83,2110.24 2649.61,2096.46 2649.61,2027.79 2728.58,1948.81 2797.25,1948.81 2862.2,1883.86 2862.2,1712.86 2856.04,1706.69 2842.52,1706.69 2838.58,1710.63 2838.58,1871.06 2829.72,1879.92 2802.17,1879.92 2793.31,1871.06 2793.31,1709.65 2783.46,1699.8 2756.89,1699.8 2748.03,1690.94 2748.03,1580.43 2736.5,1568.9 2708.66,1568.9 v2(2688.98,1549.21)
EXT_IO34: J4.4 U1.C8 | length 3109.4
  Top w5.91: J4.4@1495.08,2968.5 1527.56,2968.5 v2(1551.18,2972.44)
  Top w11.81: U1.C8@2826.77,1372.05 v2(2846.46,1391.73)
  Inner Layer 4 w5.91: v2(1551.18,2972.44) 1584.65,2972.44 1591.54,2965.55 1981.3,2965.55 1999.02,2983.27 2613.19,2983.27 2637.8,2958.66 2637.8,2693.9 2710.63,2621.06 2710.63,2221.46 2740.16,2191.93 2918.31,2191.93 2992.13,2118.11 2992.13,1514.76 2944.88,1467.52 2944.88,1422.24 2914.37,1391.73 v2(2846.46,1391.73)
EXT_IO35: J4.6 U1.C7 | length 3109.4
  Top w5.91: J4.6@1495.08,2948.82 1527.56,2948.82 v2(1551.18,2944.88)
  Top w11.81: U1.C7@2826.77,1411.42 v2(2846.46,1431.1)
  Inner Layer 4 w5.91: v2(1551.18,2944.88) 1582.68,2944.88 1590.55,2952.76 1610.24,2952.76 1618.11,2944.88 1618.11,2937.01 1624.02,2931.1 1639.76,2931.1 1645.67,2937.01 1645.67,2944.88 1653.54,2952.76 1665.35,2952.76 1673.23,2944.88 1673.23,2937.01 1679.13,2931.1 1694.88,2931.1 1700.79,2937.01 1700.79,2944.88 1708.66,2952.76 1985.21,2952.76 2003.91,2971.46 2608.3,2971.46 2625.98,2953.77 2625.98,2689.01 2698.82,2616.17 2698.82,2216.56 2735.31,2180.08 2913.46,2180.08 2980.32,2113.22 2980.32,1519.69 2938.98,1478.35 2856.3,1478.35 2846.46,1468.5 v2(2846.46,1431.1)
EXT_IO36: J4.5 U1.B9 | length 3109.1
  Top w5.91: v2(1283.46,2944.88) 1307.08,2948.82 J4.5@1339.57,2948.82
  Top w11.81: v2(2846.46,1312.99) U1.B9@2866.14,1332.68
  Inner Layer 6 w5.91: v2(1283.46,2944.88) 1311.02,2944.88 1318.9,2952.76 1456.66,2952.76 1498,2994.09 1906.5,2994.09 2245.08,2655.51 2307.09,2655.51 2477.36,2485.24 2477.36,2378.94 2501.97,2354.33 2551.18,2354.33 2581.69,2323.82 2581.69,2261.81 2599.41,2244.09 2812.99,2244.09 2992.13,2064.96 2992.13,1458.66 v2(2846.46,1312.99)
EXT_IO37: J4.3 U1.B10 | length 3109.2
  Top w5.91: v2(1283.46,2972.44) 1307.09,2968.5 J4.3@1339.57,2968.5
  Top w11.81: U1.B10@2866.14,1293.31 v2(2885.83,1312.99)
  Inner Layer 6 w5.91: v2(1283.46,2972.44) 1311.02,2972.44 1318.9,2964.57 1451.77,2964.57 1493.11,3005.91 1911.42,3005.91 2250,2667.32 2312.01,2667.32 2489.17,2490.16 2489.17,2398.62 2521.65,2366.14 2557.09,2366.14 2593.5,2329.72 2593.5,2266.73 2604.33,2255.91 2817.91,2255.91 3003.94,2069.88 3003.94,1453.74 2885.83,1335.63 v2(2885.83,1312.99)
EXT_IO38: J4.12 U1.B5 | length 3109.4
  Top w5.91: J4.12@1495.08,2889.76 1532.48,2889.76 v2(1598.43,2885.83)
  Top w11.81: U1.B5@2866.14,1490.16 v2(2885.83,1509.84)
  Inner Layer 4 w5.91: v2(1598.43,2885.83) 1629.92,2885.83 1637.8,2893.7 1989.14,2893.7 1998.99,2903.54 2493.11,2903.54 2500,2896.65 2500,2807.09 2506.89,2800.2 2516.73,2800.2 2523.62,2807.09 2523.62,2897.64 2529.53,2903.54 2541.34,2903.54 2547.24,2897.64 2547.24,2839.6 2561.05,2825.79 2586.61,2825.79 2594.49,2817.91 2594.49,2656.52 2669.29,2581.72 2669.29,2200.82 2724.45,2145.65 2899.65,2145.65 2956.69,2088.61 2956.69,1538.39 2947.83,1529.53 2915.35,1529.53 2905.51,1539.37 2905.51,1557.37 2893.98,1568.9 2876.97,1568.9 2866.14,1558.07 2866.14,1529.53 v2(2885.83,1509.84)
EXT_IO39: J4.16 U1.A4 | length 3109.6
  Top w5.91: J4.16@1495.08,2850.39 1527.56,2850.39 v2(1551.18,2854.33)
  Top w11.81: U1.A4@2905.51,1529.53 v2(2925.2,1549.21)
  Inner Layer 4 w5.91: v2(1551.18,2854.33) 1578.74,2854.33 1586.61,2846.46 1941.93,2846.46 1948.82,2853.35 2373.03,2853.35 2381.89,2844.49 2381.89,2805.12 2388.78,2798.23 2398.62,2798.23 2405.51,2805.12 2405.51,2847.44 2411.42,2853.35 2422.24,2853.35 2429.13,2846.46 2429.13,2804.13 2436.02,2797.24 2445.87,2797.24 2452.76,2804.13 2452.76,2846.46 2459.65,2853.35 2469.49,2853.35 2476.38,2846.46 2476.38,2795.28 2527.56,2744.09 2527.56,2645.67 2535.43,2637.8 2544.29,2637.8 2551.18,2644.69 2551.18,2775.59 2557.09,2781.5 2568.9,2781.5 2574.8,2775.59 2574.8,2640.75 2646.65,2568.9 2646.65,2191.93 2732.28,2106.3 2732.28,2052.17 2749.02,2035.43 2924.21,2035.43 2944.88,2014.76 2944.88,1568.9 v2(2925.2,1549.21)
EXT_IO40: J4.23 U1.B4 | length 3109.5
  Top w5.91: v2(1283.46,2767.72) 1307.09,2771.65 J4.23@1339.57,2771.65
  Top w11.81: U1.B4@2866.14,1529.53 v2(2885.83,1549.21)
  Inner Layer 6 w5.91: v2(1283.46,2767.72) 1311.02,2767.72 1318.9,2775.59 1439.96,2775.59 1453.74,2761.81 1556.1,2761.81 1582.68,2735.24 1621.06,2735.24 1641.73,2755.91 1653.54,2755.91 1661.42,2748.03 1661.42,2732.28 1669.29,2724.41 1681.1,2724.41 1688.98,2732.28 1688.98,2748.03 1696.85,2755.91 1708.66,2755.91 1716.54,2748.03 1716.54,2732.28 1724.41,2724.41 1736.22,2724.41 1744.09,2732.28 1744.09,2748.03 1751.97,2755.91 1763.78,2755.91 1771.65,2748.03 1771.65,2732.28 1779.53,2724.41 1791.34,2724.41 1799.21,2732.28 1799.21,2748.03 1807.09,2755.91 1818.9,2755.91 1826.77,2748.03 1826.77,2740.16 1835.63,2731.3 1845.47,2731.3 1854.33,2740.16 1854.33,2748.03 1862.2,2755.91 1982.31,2755.91 2057.09,2681.13 2057.09,2483.3 2073.85,2466.54 2117.1,2466.54 2133.86,2483.3 2133.86,2538.39 2138.78,2543.31 2196.85,2543.31 2200.79,2539.37 2200.79,2474.38 2190.94,2464.54 2190.94,2374.04 2206.72,2358.27 2245.05,2358.27 2259.84,2373.06 2259.84,2388.78 2268.7,2397.64 2302.19,2397.64 2384.87,2314.96 2428.15,2314.96 2572.33,2170.78 2697.83,2170.78 2708.66,2159.96 2708.66,2052.25 2751.09,2009.82 2846.46,2009.82 2856.3,1999.98 2856.3,1979.36 2869.12,1966.53 2916.37,1966.53 2921.26,1961.64 2921.26,1653.54 2905.51,1637.8 2905.51,1568.9 v2(2885.83,1549.21)
EXT_IO41: J4.17 U1.A3 | length 3109.3
  Top w5.91: v2(1283.46,2826.77) 1307.09,2830.71 J4.17@1339.57,2830.71
  Top w11.81: U1.A3@2905.51,1568.9 v2(2925.2,1588.58)
  Inner Layer 6 w5.91: v2(1283.46,2826.77) 1311.02,2826.77 1318.9,2834.65 1432.09,2834.65 1471.46,2795.28 1567.91,2795.28 1611.22,2838.58 1625,2838.58 1629.92,2833.66 1629.92,2787.4 1637.8,2779.53 1649.61,2779.53 1657.48,2787.4 1657.48,2830.71 1665.35,2838.58 1677.17,2838.58 1685.04,2830.71 1685.04,2803.15 1692.91,2795.28 1704.72,2795.28 1712.6,2803.15 1712.6,2830.71 1720.47,2838.58 1732.28,2838.58 1740.16,2830.71 1740.16,2803.15 1748.03,2795.28 1759.84,2795.28 1767.72,2803.15 1767.72,2830.71 1775.59,2838.58 1787.4,2838.58 1795.28,2830.71 1795.28,2803.15 1803.15,2795.28 1814.96,2795.28 1822.83,2803.15 1822.83,2830.71 1830.71,2838.58 1842.52,2838.58 1850.39,2830.71 1850.39,2803.15 1858.27,2795.28 1870.08,2795.28 1877.95,2803.15 1877.95,2830.71 1885.83,2838.58 1897.64,2838.58 1905.51,2830.71 1905.51,2803.15 1913.39,2795.28 1925.2,2795.28 1933.07,2803.15 1933.07,2834.65 1937.01,2838.58 1948.82,2838.58 2233.27,2554.13 2233.27,2509.87 2388.81,2354.33 2422.25,2354.33 2581.69,2194.88 2724.41,2194.88 2732.28,2187.01 2732.28,2062.04 2760.86,2033.46 2937.99,2033.46 2944.88,2026.57 2944.88,1608.27 v2(2925.2,1588.58)
EXT_IO42: J4.18 U1.B3 | length 3109.8
  Top w5.91: J4.18@1495.08,2830.71 1527.56,2830.71 v2(1551.18,2826.77)
  Top w11.81: U1.B3@2866.14,1568.9 v2(2885.83,1588.58)
  Inner Layer 4 w5.91: v2(1551.18,2826.77) 1578.74,2826.77 1586.61,2834.65 1946.82,2834.65 1953.71,2841.54 2362.2,2841.54 2370.08,2833.66 2370.08,2800.23 2384.87,2785.43 2430.12,2785.43 2437.99,2777.56 2437.99,2570.87 2449.8,2559.06 2468.5,2559.06 2479.33,2569.88 2479.33,2748.03 2486.22,2754.92 2500.03,2754.92 2515.75,2739.2 2515.75,2640.78 2530.58,2625.94 2572.9,2625.94 2580.71,2618.14 2580.71,2610.24 2572.83,2602.36 2526.57,2602.36 2519.69,2595.47 2519.69,2581.69 2526.57,2574.8 2624.02,2574.8 2634.84,2563.98 2634.84,2187.04 2720.47,2101.41 2720.47,2047.27 2744.12,2023.62 2919.32,2023.62 2933.07,2009.87 2933.07,1675.2 2905.51,1647.64 2905.51,1608.27 v2(2885.83,1588.58)
EXT_IO43: J4.22 U1.C3 | length 3109.6
  Top w5.91: J4.22@1495.08,2791.34 1532.48,2791.34 v2(1598.43,2795.28)
  Top w11.81: U1.C3@2826.77,1568.9 v2(2846.46,1588.58)
  Inner Layer 4 w5.91: v2(1598.43,2795.28) 1622.05,2795.28 1629.92,2787.4 1897.64,2787.4 1921.26,2811.02 1933.07,2811.02 1940.94,2803.15 1940.94,2783.46 1948.82,2775.59 1956.69,2775.59 1964.57,2783.46 1964.57,2803.15 1972.44,2811.02 1980.32,2811.02 1988.19,2803.15 1988.19,2783.46 1996.06,2775.59 2003.94,2775.59 2011.81,2783.46 2011.81,2803.15 2019.69,2811.02 2027.56,2811.02 2035.43,2803.15 2035.43,2783.46 2043.31,2775.59 2051.18,2775.59 2059.06,2783.46 2059.06,2803.15 2066.93,2811.02 2074.8,2811.02 2082.68,2803.15 2082.68,2783.46 2090.55,2775.59 2098.43,2775.59 2106.3,2783.46 2106.3,2803.15 2114.17,2811.02 2122.05,2811.02 2129.92,2803.15 2129.92,2783.46 2137.8,2775.59 2145.67,2775.59 2153.54,2783.46 2153.54,2803.15 2161.42,2811.02 2169.29,2811.02 2177.17,2803.15 2177.17,2783.46 2185.04,2775.59 2192.91,2775.59 2200.79,2783.46 2200.79,2803.15 2208.66,2811.02 2216.54,2811.02 2224.41,2803.15 2224.41,2783.46 2232.28,2775.59 2240.16,2775.59 2248.03,2783.46 2248.03,2803.15 2255.91,2811.02 2263.78,2811.02 2271.65,2803.15 2271.65,2783.46 2279.53,2775.59 2287.4,2775.59 2295.28,2783.46 2295.28,2803.15 2303.15,2811.02 2327.76,2811.02 2375.98,2762.8 2405.51,2762.8 2416.34,2751.97 2416.34,2546.26 2428.15,2534.45 2452.76,2534.45 2460.63,2526.57 2460.63,2473.43 2466.54,2467.52 2478.35,2467.52 2484.25,2473.43 2484.25,2526.57 2490.16,2532.48 2500.98,2532.48 2507.87,2525.59 2507.87,2474.41 2515.75,2466.54 2592.52,2466.54 2615.16,2443.9 2615.16,2178.15 2700.79,2092.52 2700.79,2035.43 2735.24,2000.98 2901.57,2000.98 2921.26,1981.3 2921.26,1701.77 2866.14,1646.65 2866.14,1608.27 v2(2846.46,1588.58)
EXT_IO44: J4.21 U1.A2 | length 3109.4
  Top w5.91: v2(1283.46,2795.28) 1307.09,2791.34 J4.21@1339.57,2791.34
  Top w11.81: U1.A2@2905.51,1608.27 v2(2925.2,1627.95)
  Inner Layer 6 w5.91: v2(1283.46,2795.28) 1328.74,2795.28 1333.66,2800.2 1333.66,2814.96 1338.58,2819.88 1348.43,2819.88 1353.35,2814.96 1353.35,2791.34 1357.28,2787.4 1368.81,2787.4 1373.03,2791.62 1373.03,2814.96 1377.95,2819.88 1388.38,2819.88 1393.7,2814.56 1393.7,2793.31 1399.61,2787.4 1444.88,2787.4 1458.66,2773.62 1561.02,2773.62 1587.6,2747.05 1614.17,2747.05 1634.84,2767.72 1987.2,2767.72 2068.9,2686.02 2068.9,2488.19 2078.74,2478.35 2112.2,2478.35 2122.05,2488.19 2122.05,2547.24 2129.92,2555.12 2204.72,2555.12 2212.6,2547.24 2212.6,2469.49 2202.76,2459.65 2202.76,2378.94 2211.61,2370.08 2240.16,2370.08 2248.03,2377.95 2248.03,2401.57 2255.91,2409.45 2307.09,2409.45 2389.76,2326.77 2433.07,2326.77 2576.77,2183.07 2708.66,2183.07 2720.47,2171.26 2720.47,2057.14 2755.96,2021.65 2925.2,2021.65 2931.1,2015.75 2931.1,2005.91 2925.2,2000 2874.02,2000 2868.11,1994.09 2868.11,1984.25 2874.02,1978.35 2921.26,1978.35 2933.07,1966.54 2933.07,1635.83 v2(2925.2,1627.95)
EXT_IO45: J4.29 U1.C2 | length 3109.6
  Top w5.91: v2(1283.46,2708.66) 1307.09,2712.6 J4.29@1339.57,2712.6
  Top w11.81: U1.C2@2826.77,1608.27 v2(2846.46,1627.95)
  Inner Layer 6 w5.91: v2(1283.46,2708.66) 1311.02,2708.66 1317.91,2715.55 1465.55,2715.55 1503.94,2677.17 1565.94,2677.17 1589.57,2700.79 1621.58,2700.79 1629.92,2692.45 1629.92,2649.61 1637.8,2641.73 1645.67,2641.73 1653.54,2649.61 1653.54,2685.04 1661.42,2692.91 1669.29,2692.91 1677.17,2685.04 1677.17,2649.61 1685.04,2641.73 1692.91,2641.73 1700.79,2649.61 1700.79,2685.04 1708.66,2692.91 1716.54,2692.91 1724.41,2685.04 1724.41,2649.61 1732.28,2641.73 1740.16,2641.73 1748.03,2649.61 1748.03,2685.04 1755.91,2692.91 1763.78,2692.91 1771.65,2685.04 1771.65,2649.61 1779.53,2641.73 1787.4,2641.73 1795.28,2649.61 1795.28,2685.04 1803.15,2692.91 1811.02,2692.91 1818.9,2685.04 1818.9,2649.61 1826.77,2641.73 1834.65,2641.73 1842.52,2649.61 1842.52,2686.02 1849.41,2692.91 1863.65,2692.91 1883.34,2712.6 1889.76,2712.6 1897.64,2712.6 1905.51,2704.72 1905.51,2675.2 1911.42,2669.29 1923.23,2669.29 1929.13,2675.2 1929.13,2704.72 1937.01,2712.6 1974.44,2712.6 2025.59,2661.45 2025.59,2401.6 2070.9,2356.3 2155.54,2356.3 2186.13,2325.71 2326.88,2325.71 2363.22,2289.37 2420.28,2289.37 2562.99,2146.65 2675.18,2146.65 2685.04,2136.8 2685.04,2042.47 2742.27,1985.24 2815.97,1985.24 2859.3,1941.91 2887.8,1941.91 2897.64,1932.07 2897.64,1668.31 2889.76,1660.43 2855.32,1660.43 2846.46,1651.57 v2(2846.46,1627.95)
EXT_IO46: J4.24 U1.D2 | length 3109.5
  Top w5.91: J4.24@1495.08,2771.65 1532.48,2771.65 v2(1598.43,2767.72)
  Top w11.81: U1.D2@2787.4,1608.27 v2(2807.09,1627.95)
  Inner Layer 4 w5.91: v2(1598.43,2767.72) 1622.05,2767.72 1628.94,2774.61 1933.1,2774.61 1943.96,2763.75 2252.95,2763.75 2260.83,2755.88 2260.83,2669.29 2267.72,2662.4 2277.56,2662.4 2284.45,2669.29 2284.45,2756.89 2291.31,2763.75 2301.18,2763.75 2308.07,2756.86 2308.07,2721.46 2314.96,2714.57 2325.79,2714.57 2332.68,2721.46 2332.68,2769.69 2338.58,2775.59 2346.46,2775.59 2357.28,2764.76 2357.28,2600.39 2364.17,2593.5 2374.02,2593.5 2380.91,2600.39 2380.91,2743.11 2388.74,2750.94 2396.65,2750.94 2404.53,2743.07 2404.53,2541.37 2423.26,2522.64 2439.96,2522.64 2448.82,2513.78 2448.82,2468.53 2462.63,2454.72 2586.61,2454.72 2603.35,2437.99 2603.35,2173.26 2688.98,2087.63 2688.98,2030.54 2730.35,1989.17 2896.68,1989.17 2909.45,1976.41 2909.45,1706.66 2869.12,1666.34 2845.47,1666.34 v2(2807.09,1627.95)
EXT_IO47: J4.30 U1.E2 | length 3109.4
  Top w5.91: J4.30@1495.08,2712.6 1527.56,2712.6 v2(1551.18,2708.66)
  Top w11.81: U1.E2@2748.03,1608.27 v2(2767.72,1627.95)
  Inner Layer 4 w5.91: v2(1551.18,2708.66) 1574.8,2708.66 1582.68,2716.54 1979.33,2716.54 1988.19,2707.68 2004.92,2707.68 2013.78,2716.54 2028.54,2716.54 2037.4,2707.68 2056.1,2707.68 2064.96,2716.54 2076.77,2716.54 2085.63,2707.68 2085.63,2608.27 2092.52,2601.38 2102.36,2601.38 2109.25,2608.27 2109.25,2709.65 2116.14,2716.54 2125.98,2716.54 2132.87,2709.65 2132.87,2608.27 2139.76,2601.38 2149.61,2601.38 2156.5,2608.27 2156.5,2709.65 2163.39,2716.54 2173.23,2716.54 2180.12,2709.65 2180.12,2608.27 2187.01,2601.38 2196.85,2601.38 2203.74,2608.27 2203.74,2709.65 2210.63,2716.54 2217.55,2716.54 2227.36,2706.72 2227.36,2469.52 2242.16,2454.72 2267.72,2454.72 2283.05,2470.06 2350.39,2470.06 2359.76,2479.42 2359.92,2479.25 2391.84,2479.25 2391.92,2479.33 2405.51,2479.33 2415.35,2469.49 2415.35,2455.74 2518.73,2352.36 2564.99,2352.36 2573.82,2343.53 2573.82,2161.45 2660.43,2074.83 2660.43,2018.73 2719.6,1959.56 2868.22,1959.56 2885.83,1941.96 2885.83,1722.41 2872.08,1708.66 2803.15,1708.66 2767.72,1673.23 v2(2767.72,1627.95)
EXT_IO48: J4.41 U1.F2 | length 3109.2
  Top w5.91: v2(1283.46,2590.55) 1307.09,2594.49 J4.41@1339.57,2594.49
  Top w11.81: U1.F2@2708.66,1608.27 v2(2728.35,1627.95)
  Inner Layer 6 w5.91: v2(1283.46,2590.55) 1311.02,2590.55 1318.9,2598.43 1486.22,2598.43 1525.59,2559.06 1567.05,2559.06 1586.74,2578.74 1608.27,2578.74 1622.05,2564.96 1622.05,2484.25 1629.92,2476.38 1637.8,2476.38 1645.67,2484.25 1645.67,2570.87 1653.54,2578.74 1661.42,2578.74 1669.29,2570.87 1669.29,2484.25 1677.17,2476.38 1685.04,2476.38 1692.91,2484.25 1692.91,2570.87 1700.79,2578.74 1708.66,2578.74 1716.54,2570.87 1716.54,2496.06 1724.41,2488.19 1732.28,2488.19 1740.16,2496.06 1740.16,2570.87 1748.03,2578.74 1755.91,2578.74 1763.78,2570.87 1763.78,2496.06 1771.65,2488.19 1779.53,2488.19 1787.4,2496.06 1787.4,2570.87 1795.28,2578.74 1807.09,2578.74 1814.96,2570.87 1814.96,2521.68 1827.79,2508.86 1851.38,2508.86 1862.2,2498.03 1862.2,2390.78 1887.86,2365.12 1957.71,2365.12 1963.58,2359.25 1963.58,2287.43 1990.19,2260.83 2309.08,2260.83 2327.78,2242.13 2400.59,2242.13 2544.41,2098.31 2625.12,2098.31 2637.8,2085.63 2637.8,2022.9 2724.67,1936.02 2793.34,1936.02 2803.66,1925.7 2803.66,1897.99 2794.91,1889.24 2794.79,1889.24 2781.5,1875.96 2781.5,1719.49 2773.7,1711.7 2752.08,1711.7 2728.35,1687.96 v2(2728.35,1627.95)
EXT_IO49: J4.33 U1.D3 | length 3109.3
  Top w5.91: v2(1283.46,2677.17) 1307.09,2673.23 J4.33@1339.57,2673.23
  Top w11.81: U1.D3@2787.4,1568.9 v2(2807.09,1588.58)
  Inner Layer 6 w5.91: v2(1283.46,2677.17) 1311.02,2677.17 1319.88,2668.31 1461.61,2668.31 1473.43,2656.5 1562.99,2656.5 1601.38,2618.11 1852.36,2618.11 1887.8,2653.54 1937.01,2653.54 1956.69,2633.86 1956.69,2426.18 1962.6,2420.28 1974.41,2420.28 1980.32,2426.18 1980.32,2657.48 1988.19,2665.35 1996.06,2665.35 2003.94,2657.48 2003.94,2315.94 2020.67,2299.21 2326.77,2299.21 2348.43,2277.56 2415.35,2277.56 2558.07,2134.84 2660.43,2134.84 2673.23,2122.05 2673.23,2037.58 2737.45,1973.35 2811.15,1973.35 2885.83,1898.68 2885.83,1682.09 2875.98,1672.24 2844.49,1672.24 2826.77,1654.53 2826.77,1608.27 v2(2807.09,1588.58)